# Altium PCB Irradiance Sensor2.PcbDoc
Units mil, origin at the board's own origin, x right, y up, seen from the top; angles counter-clockwise.
Board outline 4210 x 2650 mil, 2 copper layers (Top Layer, Bottom Layer); 70 components, 50 nets, 240 pads, 29 vias.
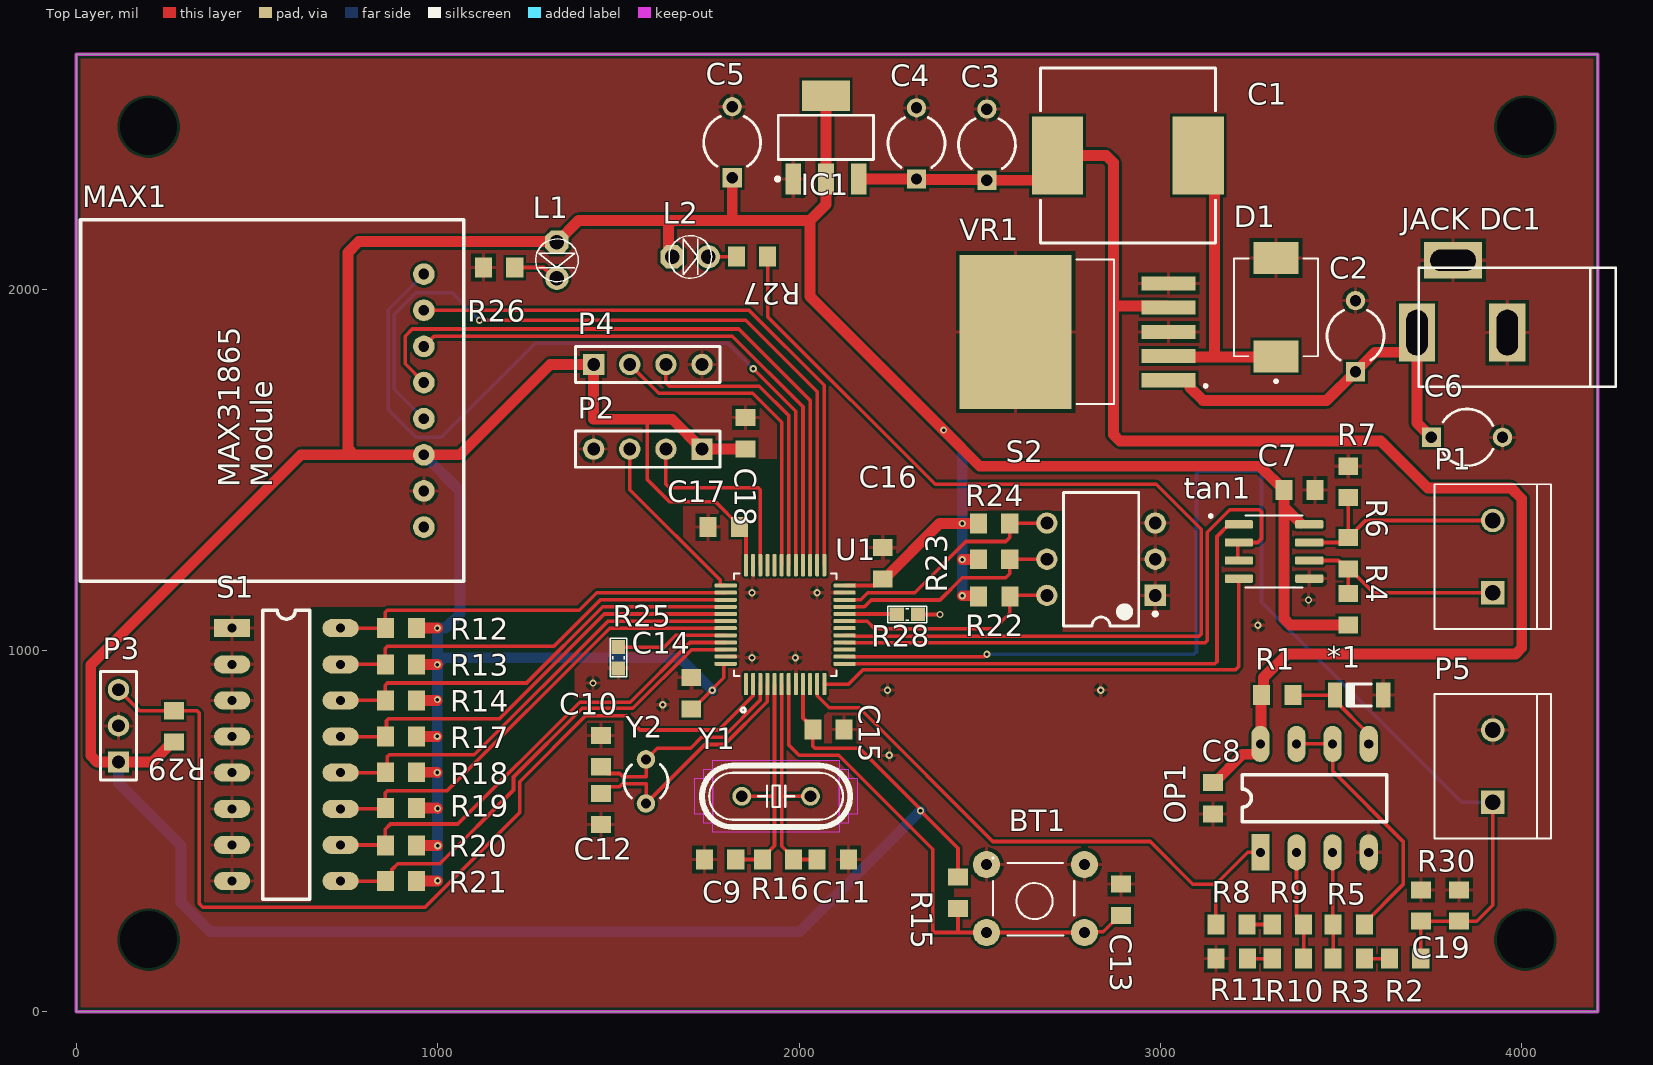
[diagram p0: Top Layer view]
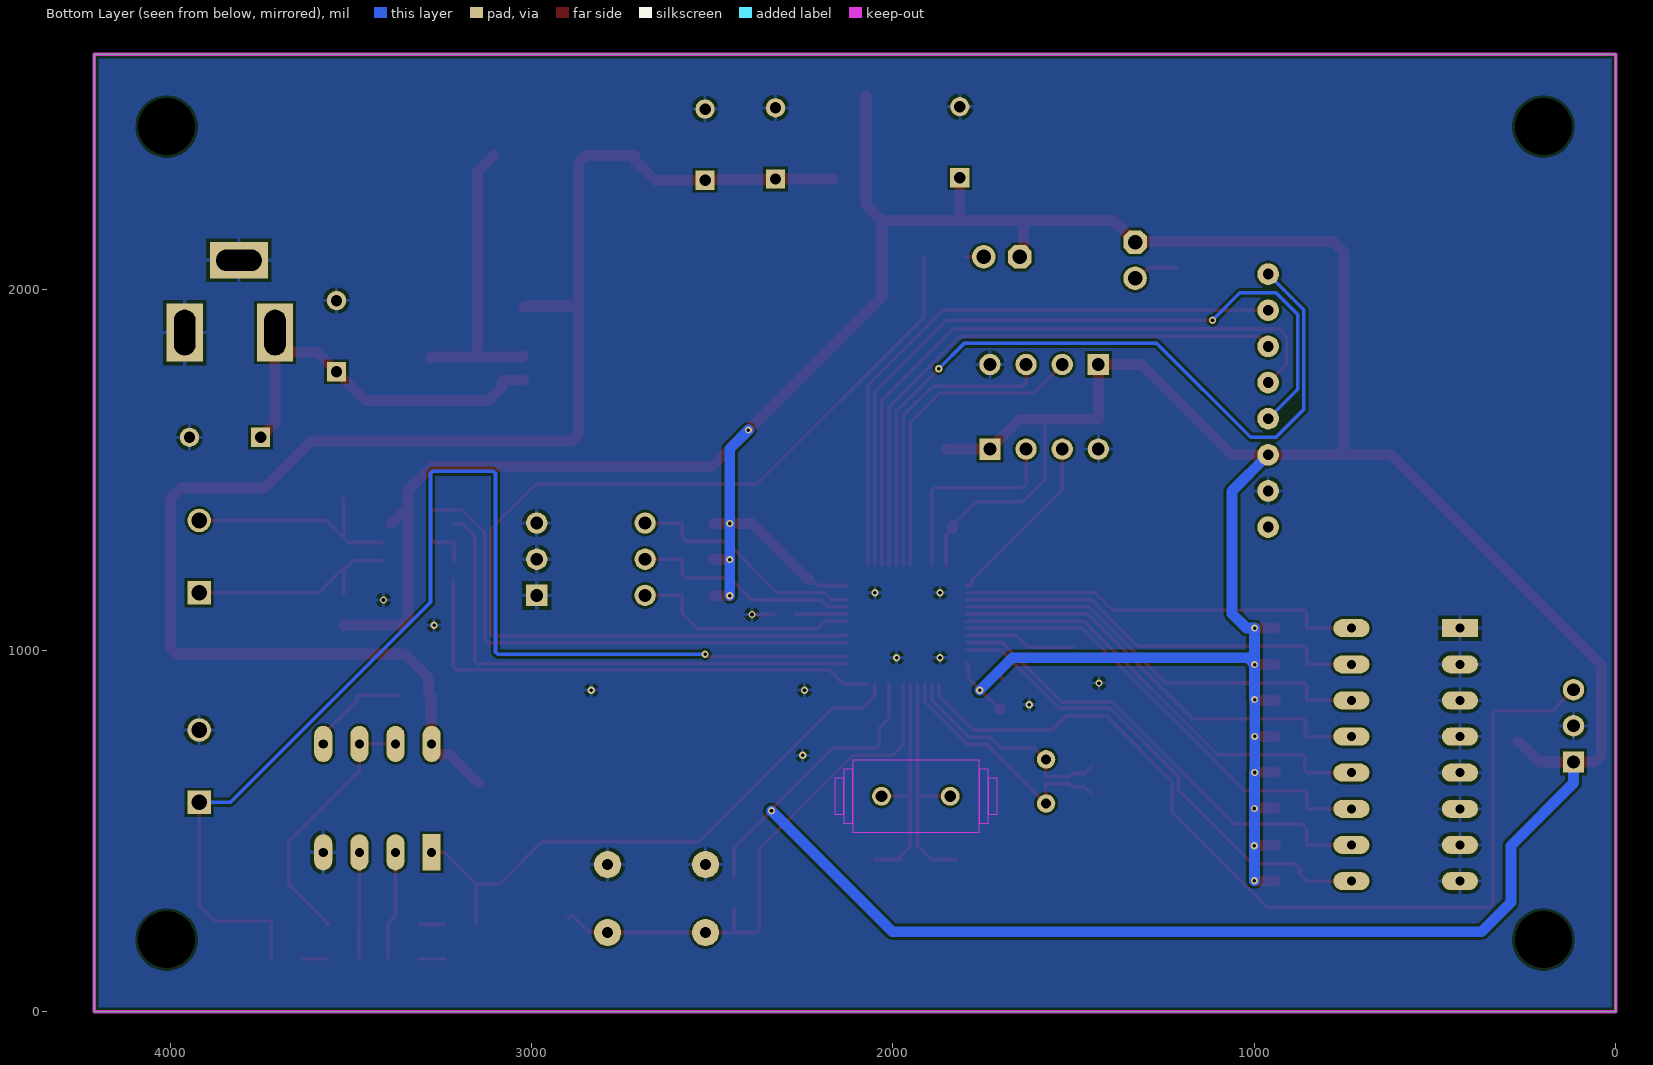
[diagram p1: Bottom Layer view, seen from below]

## Layer stack, top to bottom
Top Solder: solder mask 0.4, Solder Resist, Dk 3.5
Top Layer: signal copper 1.4
Dielectric 1: dielectric 12.6, FR-4, Dk 4.8
Bottom Layer: signal copper 1.4
Bottom Solder: solder mask 0.4, Solder Resist, Dk 3.5

## Board outline
0,0.12 0,2650.12 4210,2650.12 4210,117.83 4210,0.12

## Design rules (kind name [scope] priority, off if disabled: settings)
Clearance [All] p1: gap=7 ignorepadtopadclearanceinfootprint=FALSE
PolygonConnect [All] p1: connectstyle=Relief reliefconductorwidth=10 reliefentries=4 polygonreliefangle="90 Angle" airgapwidth=10
RoutingVias [All] p1: holewidth=10 width=20 viastyle="Through Hole" minholewidth=10 minwidth=20 maxholewidth=28 maxwidth=50
SolderMaskExpansion [IsVia] p1: expansion=4 istentingtop=TRUE
SolderMaskExpansion SolderMaskExpansion_1 [All] p2: expansion=4 istentingtop=FALSE
Width Width_1 [InNetClass('Power Supply')] p1: maxlimit=30 minlimit=10 preferedwidth=30
Width [All] p2: maxlimit=30 minlimit=10 preferedwidth=10
30 further rules are at their usual default settings.

## Classes and differential pairs
component class "Irradiance Sensor": *1 BT1 C1 C2 C3 C4 C5 C6 C7 C8 C9 C10 C11 C12 C13 C14 C15 C16 C17 C18 C19 IC1 "JACK DC1" L1 L2 MAX1 OP1 P1 P2 P3 P4 P5 R1 R2 R3 R4 R5 R6 R7 R8 R9 R10 R11 R12 R13 R14 R15 R16 R17 R18 R19 R20 R21 R22 R23 R24 R26 R29 R30 S1 S2 tan1 U1 VR1 Y1 Y2

## Components (designator, comment, footprint, x,y, rotation, side; value= is the part's Value field where it differs from the comment)
*1 "BZV55" SOD-80C 3549.99,876.8 r0 top
BT1 "Nut Nhan 4 Chan Cam 6x6" "Nut Nhan 4 Chan Cam 6x6" 2776.69,211.8 r180 top
C1 "L127H" INDP122122X80N 2910,2370.12 r180 top
C2 "Cap2" CAPR5-4X5 3540,1870.12 r90 top value=680uF
C3 "Cap2" CAPR5-4X5 2520,2400.12 r90 top value=1000uF
C4 "Cap2" CAPR5-4X5 2325,2403.54 r90 top value=10uF
C5 "Cap2" CAPR5-4X5 1815,2406.69 r90 top value=10uF
C6 "Cap2" CAPR5-4X5 3848.43,1590.12 r0 top value=100pF
C7 "Cap" RESC2012X11N 3385,1444.23 r0 top
C8 "Cap" RESC2012X11N 3145.15,591.11 r270 top
C9 "Cap" RESC2012X11N 1781.69,421.8 r0 top
C10 "Cap" RESC2012X11N 1451.69,721.8 r270 top
C11 "Cap" RESC2012X11N 2093.56,421.8 r180 top
C12 "Cap" RESC2012X11N 1451.69,561.63 r90 top
C13 "Cap" RESC2012X11N 2891.32,310.32 r90 top
C14 "Cap" RESC2012X11N 1701.69,881.8 r90 top
C15 "Cap" RESC2012X11N 2081.69,781.8 r0 top
C16 "Cap" RESC2012X11N 2231.69,1241.8 r90 top
C17 "Cap" RESC2012X11N 1791.69,1341.8 r180 top
C18 "Cap" RESC2012X11N 1852.3,1601.25 r90 top
C19 "Cap" RESC2012X11N 3721.22,294.45 r90 top
D1 "SS34" DIOM7959X265N 3320,1950.12 r90 top
IC1 "LM1117" SOT230P700X180-4N 2074.45,2420.28 r90 top
"JACK DC1" "JACK DC 5.5" "JACK DC 5.5" 3835,1980.12 r180 top value="Jac DC"
L1 "LED 3mm" LED-3MM-RED 1330,2130.12 r270 top
L2 "LED 3mm" LED-3MM-GREEN 1649.12,2089.67 r0 top
MAX1 "MAX31865" MAX31865 961.69,1341.8 r90 top
OP1 "MCP6002" DIP8 3276.69,441.8 r90 top
P1 "Header 2" TE_282837-2 3920,1260.12 r90 top
P2 "SWD" HDR1X4 1731.69,1557.5 r180 top
P3 "DS18B20 Input" HDR1X3 116.69,691.8 r90 top
P4 "Debug" HDR1X4 1431.69,1791.8 r0 top
P5 "Header 2" TE_282837-2 3920,680.12 r90 top
R1 "Res" RESC2012X11N 3323.38,876.8 r180 top value=1k
R2 "Res" RESC2012X11N 3677.21,147.52 r180 top value=1k
R3 "Res" RESC2012X11N 3521.51,147.52 r180 top value=1k
R4 "Res" RESC2012X11N 3520,1114.23 r270 top value=1k
R5 "Res" RESC2012X11N 3521.51,241.8 r180 top value=1k
R6 "Res" RESC2012X11N 3520,1269.23 r270 top value=1k
R7 "Res" RESC2012X11N 3520,1466.81 r270 top value=1k
R8 "Res" RESC2012X11N 3197.69,147.52 r0 top value=1k
R9 "Res" RESC2012X11N 3352.94,147.52 r0 top value=1k
R10 "Res" RESC2012X11N 3352.94,241.91 r180 top value=1k
R11 "Res" RESC2012X11N 3196.83,241.8 r180 top value=1k
R12 "Res" RESC2012X11N 898.38,1062.09 r180 top value=1k
R13 "Res" RESC2012X11N 898.38,961.83 r180 top value=1k
R14 "Res" RESC2012X11N 898.38,862.04 r180 top value=1k
R15 "Res" RESC2012X11N 2440,330.12 r90 top value=1k
R16 "Res" RESC2012X11N 1941.69,421.8 r180 top value=1k
R17 "Res" RESC2012X11N 898.38,761.8 r180 top value=1k
R18 "Res" RESC2012X11N 898.38,663.37 r180 top value=1k
R19 "Res" RESC2012X11N 898.38,564.39 r180 top value=1k
R20 "Res" RESC2012X11N 898.38,460.64 r180 top value=1k
R21 "Res" RESC2012X11N 898.38,362.37 r180 top value=1k
R22 "Res" RESC2012X11N 2540,1150.12 r0 top value=1k
R23 "" RESC2012X11N 2539.8,1252.87 r0 top value=1k
R24 "" RESC2012X11N 2539.8,1352.07 r0 top value=1k
R25 "10k" "tro smd 0603" 1500,980.12 r90 top
R26 "Res" RESC2012X11N 1170,2060.12 r0 top value=1k
R27 "Res" RESC2012X11N 1870,2090.12 r180 top value=1k
R28 "10k" "tro smd 0603" 2300,1100 r180 top
R29 "Res" RESC2012X11N 270,790.12 r270 top value=1k
R30 "Res" RESC2012X11N 3826.87,294.45 r270 top value=1k
S1 "SW DIP-8" DIP16 431.16,1062.09 r0 top
S2 "SW DIP-3" DIP-6 2835.84,1252.87 r180 top
tan1 "MAX3485EESA+" SOIC127P600X175-8N 3314.54,1274.23 r0 top
U1 "STM32F103C8T6" QFP50P900X900X160-48N 1961.69,1071.75 r90 top
VR1 "LM2596S-5.0" TO170P1524X483-6N 2770.82,1882.05 r180 top
Y1 "8Mhz" HC49US 1936.69,596.8 r0 top
Y2 "32,768k" R38 1576.36,637.82 r180 top

## Footprints (in the part's own frame and the unit in brackets; to place one, negate y for a bottom-side part, rotate by r counter-clockwise, add the part's x,y. Pads: shape width x height; smd on the part's side, far side on the other; paste and mask are expansions set on the pad)
CAPR5-4X5 [mm] "Capacitor; 2 Leads"
  rect 1.35x1.35 hole 0.8: 1(-2.5,0)
  round 1.35 hole 0.8: 2(2.5,0)
  silkscreen extent -1.69,-2 1.82,2
DIOM7959X265N [mm]
  rect 2.25x3.18 smd: A(3.455,0) C(-3.455,0)
  silkscreen extent -5.3,-2.95 3.44,2.95
DIP8 [mil]
  rect 100x50 hole 25: 1(0,0)
  oval 100x50 hole 25: 2(0,-100) 3(0,-200) 4(0,-300) 5(300,-300) 6(300,-200) 7(300,-100) 8(300,0)
  silkscreen extent 85,-350 215,50
DIP16 [mil]
  rect 100x50 hole 25: 1(0,0)
  oval 100x50 hole 25: 2(0,-100) 3(0,-200) 4(0,-300) 5(0,-400) 6(0,-500) 7(0,-600) 8(0,-700) 9(300,-700) 10(300,-600) 11(300,-500) 12(300,-400) 13(300,-300) 14(300,-200) 15(300,-100) 16(300,0)
  silkscreen extent 85,-750 215,50
DIP-6 [mm] "DIP; 6 Leads; Row Spacing 7.62 mm; Pitch 2.54 mm"
  rect 1.5x1.5 hole 0.9: 1(-3.81,2.54)
  round 1.5 hole 0.9: 2(-3.81,0) 3(-3.81,-2.54) 4(3.81,-2.54) 5(3.81,0) 6(3.81,2.54)
  silkscreen extent -3.94,-4.7 2.65,4.7, body extent -3.55,-4.7 3.55,4.7, height 5.46
HC49US [mil]
  round 52 hole 32: 1(-95,0) 2(95,0)
  Keep-Out Layer region: 175,-100 -175,-100 -175,100 175,100
  Keep-Out Layer region: -175,-75 -200,-75 -200,75 -175,75
  Keep-Out Layer region: -200,-50 -225,-50 -225,50 -200,50
  Keep-Out Layer region: 200,-75 175,-75 175,75 200,75
  Keep-Out Layer region: 225,-50 200,-50 200,50 225,50
  silkscreen extent -205,-85 205,85
HDR1X3 [mm] "Connector; Header; 3 Position"
  rect 1.5x1.5 hole 0.9: 1(0,0)
  round 1.5 hole 0.9: 2(2.54,0) 3(5.08,0)
  silkscreen extent -1.27,-1.27 6.35,1.27
HDR1X4 [mm] "Connector; Header; 4 Position"
  rect 1.5x1.5 hole 0.9: 1(0,0)
  round 1.5 hole 0.9: 2(2.54,0) 3(5.08,0) 4(7.62,0)
  silkscreen extent -1.27,-1.27 8.89,1.27
INDP122122X80N [mm] "Precision Wire Wound Inductor, 2-Leads, Body 12.15x12.15mm, IPC Medium Density"
  rect 3.6x5.5 smd: 1(-4.95,0) 2(4.95,0)
  silkscreen extent -6.15,-6.15 6.15,6.15, body extent -6.15,-6.15 6.15,6.15, height 8
"JACK DC 5.5" [mil] "Jac DC input"
  rect 100x160 hole 59.06 slot 125.98 at 90 deg: 1(125,100) 2(-125,100)
  rect 160x100 hole 59.06 slot 125.98 at 0 deg: 3(25,-100)
  silkscreen extent -425,-80 120,250, body extent -410,-105 134,269, height 434
LED-3MM-GREEN [mil]
  oct 65x65 hole 40: 1(0,0)
  round 65 hole 40: 2(100,0)
  silkscreen extent -9,-59 109,59, body extent -15,-70 112,60, height 182
LED-3MM-RED [mil]
  oct 65x65 hole 40: 1(0,0)
  round 65 hole 40: 2(100,0)
  silkscreen extent -9,-59 109,59, body extent -27,-77 117,80, height 181
MAX31865 [mil]
  round 60 hole 30: 1(0,0) 2(100,0) 3(200,0) 4(300,0) 5(400,0) 6(500,0) 7(600,0) 8(700,0)
  silkscreen extent -150,-110 850,950
"Nut Nhan 4 Chan Cam 6x6" [mil] "SW button 4pin, 250 x250 mil"
  round 75 hole 31: 1(-13,-8) 1(258,-8) 2(-13,-196) 2(258,-196)
  silkscreen extent 15,-215 240,0, body extent -31,-225 281,19, height 276
QFP50P900X900X160-48N [mm]
  rrect50% 1.56x0.28 smd: 1(-4.18,2.75) 2(-4.18,2.25) 3(-4.18,1.75) 4(-4.18,1.25) 5(-4.18,0.75) 6(-4.18,0.25) 7(-4.18,-0.25) 8(-4.18,-0.75) 9(-4.18,-1.25) 10(-4.18,-1.75) 11(-4.18,-2.25) 12(-4.18,-2.75) 25(4.18,-2.75) 26(4.18,-2.25) 27(4.18,-1.75) 28(4.18,-1.25) 29(4.18,-0.75) 30(4.18,-0.25) 31(4.18,0.25) 32(4.18,0.75) 33(4.18,1.25) 34(4.18,1.75) 35(4.18,2.25) 36(4.18,2.75)
  rrect50% 0.28x1.56 smd: 13(-2.75,-4.18) 14(-2.25,-4.18) 15(-1.75,-4.18) 16(-1.25,-4.18) 17(-0.75,-4.18) 18(-0.25,-4.18) 19(0.25,-4.18) 20(0.75,-4.18) 21(1.25,-4.18) 22(1.75,-4.18) 23(2.25,-4.18) 24(2.75,-4.18) 37(2.75,4.18) 38(2.25,4.18) 39(1.75,4.18) 40(1.25,4.18) 41(0.75,4.18) 42(0.25,4.18) 43(-0.25,4.18) 44(-0.75,4.18) 45(-1.25,4.18) 46(-1.75,4.18) 47(-2.25,4.18) 48(-2.75,4.18)
  silkscreen extent -6.15,-3.6 3.6,3.6
R38 [mm] "Crystal, Thru-Hole; 2 Leads; Body 3.1 x 8.2 mm (Dia.xH)"
  round 1.3 hole 0.7: 1(0,1.55) 2(0,-1.55)
  silkscreen extent -1.55,-1.19 1.55,1.17
RESC2012X11N [mm] "Chip Resistor, 2-Leads, Body 2.00x1.25mm, IPC Medium Density"
  rect 1.2x1.4 smd: 1(-1.1,0) 2(1.1,0)
  body extent -1.1,-0.72 1.1,0.73, height 1.1
SOD-80C [mm] "MELF Diode, 2-Leads, Body 3.50x1.53mm, IPC Medium Density"
  rect 1x1.75 smd: 1(-1.7,0) 2(1.7,0)
  silkscreen extent -0.85,-0.77 0.85,0.77, body extent -1.85,-0.8 1.85,0.8, height 1.6
SOIC127P600X175-8N [mm]
  rrect25% 1.97x0.59 smd: 1(-2.475,1.905) 2(-2.475,0.635) 3(-2.475,-0.635) 4(-2.475,-1.905) 5(2.475,-1.905) 6(2.475,-0.635) 7(2.475,0.635) 8(2.475,1.905)
  silkscreen extent -4.54,-2.52 2,2.59
SOT230P700X180-4N [mm] "SOT223, 4-Leads, Body 6.50x7.00mm (avg), Pitch 2.30mm, IPC Medium Density"
  rect 2.15x1.1 smd: 1(-2.925,2.3) 2(-2.925,0) 3(-2.925,-2.3)
  rect 2.15x3.35 smd: 4(2.925,0)
  silkscreen extent -3.05,-3.35 1.55,3.52, body extent -1.85,-3.35 1.85,3.35, height 1.8
TE_282837-2 [mm]
  rect 1.65x1.65 hole 1.1: 1(-2.54,0)
  round 1.65 hole 1.1: 2(2.54,0)
  silkscreen extent -5.08,-4.1 5.08,4.1, body extent -5.63,-4.26 5.13,3.94, height 9.79
TO170P1524X483-6N [mm]
  rect 3.79x0.99 smd: 1(-6.4,3.4) 2(-6.4,1.7) 3(-6.4,0) 4(-6.4,-1.7) 5(-6.4,-3.4)
  rect 7.88x10.84 smd paste-6: 6(4.35,0)
  silkscreen extent -9.1,-5.08 0.09,5.08
"tro smd 0603" [mm] "Chip Capacitor, 2-Leads, Body 1,60x0,80mm, IPC Medium Density"
  rect 1x0.95 smd mask+0.076: 1(-0.75,0) 2(0.75,0)
  silkscreen extent -1.35,-0.58 1.37,0.58, body extent -0.82,-0.42 0.82,0.43, height 0.44

## Part data
BT1: "Nut Nhan 4 Chan 6x6mm", Ma_Hang=MH004584, Ten="Nút Nhấn 4 Chân 6x6x5MM DIP"
C2 C3 C4 C5 C6: "Capacitor", PackageDescription="Capacitor; 2 Leads", PackageReference=CAPR5-4X5, Published=23-Sep-2002, Publisher="Altium Limited"
D1: "Diode Schottky 40V 3A Surface Mount SMC _DO-214AB_", Package="DO-214AB-214 ON Semiconductor", Availability=Unavailable, MF="ON Semiconductor", MP=SS34, Price=None, SnapEDA_Link=https://www.snapeda.com/parts/SS34/ON%20Semiconductor/view-part/4631325/?ref=snap
L1: library part "LED 3mm Do", "Cắm", Chung_Loai=Cắm, Don_Vi=Con, Ma_Hang=MH003892, Ten_Linh_Kien="Led 3MM Phủ Đỏ (10c)"
L2: library part "LED 3mm Xanh La", "Cắm", Chung_Loai=Cắm, Don_Vi=Con, Ma_Hang=MH001054, Ten_Linh_Kien="Led 3MM Phủ Xanh (10c)"
P1 P5: "Header, 2-Pin", LatestRevisionDate=17-Jul-2002, LatestRevisionNote="Re-released for DXP Platform.", Publisher="Altium Limited"
P2 P4: library part "Header 4", "Header, 4-Pin", LatestRevisionDate=17-Jul-2002, LatestRevisionNote="Re-released for DXP Platform.", Publisher="Altium Limited"
P3: library part "Header 3", "Header, 3-Pin", LatestRevisionDate=17-Jul-2002, LatestRevisionNote="Re-released for DXP Platform.", Publisher="Altium Limited"
R23 R24: library part Res
R25 R28: library part "Tro 0603 1% 10k", "Dán", Chung_Loai=Dán, Don_Vi=Con, Ma_Hang=MH006333, So_Chan=2, Ten_Linh_Kien="Trở 0603 1% 10k"
S1: "DIP Switch, 8 Position, SPST", LatestRevisionDate=17-Jul-2002, LatestRevisionNote="Re-released for DXP Platform.", PackageDescription="DIP Switch; 16 Leads", PackageReference=DIP_SW_8WAY_SMD, Published=24-Mar-1999, Publisher="Altium Limited"
S2: "DIP Switch, 3 Position, SPST", Code_JEDEC=MO-001-AM, LatestRevisionDate=17-Jul-2002, LatestRevisionNote="Re-released for DXP Platform.", PackageReference=DIP-6, Published=24-Mar-1999, Publisher="Altium Limited"
tan1: "1/1 Transceiver Half RS422, RS485 8-SOIC", Package="SOIC-8 Maxim", Availability=Unavailable, MF="Maxim Integrated", MP=MAX3485EESA+, Price=None, SnapEDA_Link=https://www.snapeda.com/parts/MAX3485EESA%2B/Maxim%20Integrated/view-part/558005/?ref=snap
U1: "ARMÂ® CortexÂ®-M3 STM32F1 Microcontroller IC 32-Bit 72MHz 64KB _64K x 8_ FLASH", Package="LQFP-48 STMicroelectronics", Availability=Unavailable, MF=STMicroelectronics, MP=STM32F103C8T6, Price=None, SnapEDA_Link=https://www.snapeda.com/parts/STM32F103C8T6/STMicroelectronics/view-part/52195/?ref=snap
VR1: "SIMPLE SWITCHER&reg; 4.5V to 40V, 3A Low Component Count Step-Down Regulator 5-DDPAK/TO-263", Package="TO-263-5 Texas Instruments", Availability=Good, DigiKey-Purchase-URL=https://snapeda.com/shop?store=DigiKey&id=15588, MF="Texas Instruments", Mouser-Purchase-URL=https://snapeda.com/shop?store=Mouser&id=15588, MP=LM2596S-5.0/NOPB, Price=None, SnapEDA_Link=https://www.snapeda.com/parts/LM2596S-5.0/NOPB/Texas%20Instruments/view-part/15588/?ref=snap, Texas_Instruments-Purchase-URL=https://snapeda.com/shop?store=Texas+Instruments&id=15588
Y1: library part DIP-CRYSTAL-8MHZ-20PF-20PPM-60R(HC49US), "DIP Crystal 8MHz-20pF-20ppm-60R;", Package=None, Availability=Unavailable, MF=Xinhunjing, MP=49S8M, Price=None, SnapEDA_Link=https://www.snapeda.com/parts/49S8M/Xinhunjing/view-part/105661/?ref=snap
Y2: library part XTAL, "Crystal Oscillator", LatestRevisionDate=17-Jul-2002, LatestRevisionNote="Re-released for DXP Platform.", PackageDescription="Crystal, Thru-Hole; 2 Leads; Body 3.1 x 8.2 mm (Dia.xH)", PackageReference=R38, Published=8-Jun-2000, Publisher="Altium Limited"
C7 C8 C14 C15 C16 C17 C18 C19: Cap=0.1uF
C9 C10 C11 C12: Cap=20pF
C13: Cap=0.01uF

## Free pads (board coordinates)
  round 60 hole 157.48: 2(200,200.12) 2(200,2450.12) 2(4010,200.12) 2(4010,2450.12)

## Via types
v1: diameter 20, hole 10, Top Layer to Bottom Layer, tented both sides, 29 vias

## Nets (pads, with @x,y where several pads share a name; then routed paths per layer and width w, separated by ;. In a path a pad name is that pad's centre, name@x,y a point inside that pad or via, vN(x,y) a via of type N, cw(c..) or ccw(c..) an arc to the next point about the centre after c; other vN are vias at no path point)
3.3V: C5.1 C7.1 C14.1 C15.1 C16.1 C17.1 C18.1 IC1.2 IC1.4 L1.1 L2.1 MAX1.3 P2.1 P3.1 P4.1 R4.2 R12.1 R13.1 R14.1 R15.2 R17.1 R18.1 R19.1 R20.1 R21.1 R22.1 R23.1 R24.1 R29.2 tan1.8 U1.9 U1.24 U1.36 U1.48 | length 15433.6
  Top Layer w10: 1431.69,1640.12 1431.69,1641.8 ; 1580,1640.12 1580,1473.48 1641.69,1411.8 1768.93,1411.8 C17.1@1834.99,1345.74 ; C14.1@1705.62,838.49 1791.69,924.56 1791.69,962.97 1792.2,963.48 U1.48 ; C17.1@1834.99,1337.86 1853.42,1319.44 U1.36 ; U1.9 2010.9,813.22 C15.1@2038.38,785.74 ; C15.1 2038.38,735.98 2044.24,730.12 2167.25,730.12 2334.2,563.17 2334.2,558.76 v1(2336.11,556.85) 2440,452.96 R15.2 ; U1.24 2209.28,1180.02 C16.1@2227.75,1198.49
  Top Layer w30: R29.2 266.07,746.81 211.06,691.8 57.58,691.8 40,709.37 40,960.12 621.69,1541.8 769.26,1541.8 ; R21.1 999.14,362.37 v1(999.72,362.96) ; R20.1 999.48,460.64 v1(1000,460.12) ; R19.1 998.53,564.39 v1(999.81,563.1) ; R18.1 997.99,663.37 v1(998.83,662.53) ; R17.1 v1@998.83,761.8 ; R14.1 998.59,862.04 v1@998.83,861.8 ; R13.1 998.63,961.83 v1(999.3,961.17) ; R12.1 999.23,1062.09 v1(999.3,1062.16) ; L2.1 1639.09,2099.71 1639.09,2179.2 1650,2190.12 ; C14.1 C14.1@1705.62,838.49 ; C5.1 1815,2195.12 1810,2190.12 ; C17.1@1834.99,1337.86 C17.1 C17.1@1834.99,1345.74 ; C18.1 1852.08,1557.72 1731.91,1557.72 P2.1 1649.07,1640.12 1580,1640.12 1431.69,1640.12 P4.1 1311.69,1791.8 1061.69,1541.8 MAX1.3 769.26,1541.8 ; IC1.4 IC1.2 2074.45,2234.57 2030,2190.12 ; C16.1 2235.62,1198.49 2388.93,1351.8 v1(2451.69,1351.8) 2496.22,1351.8 R24.1 ; v1(2451.69,1151.8) 2495.28,1151.8 R22.1@2496.49,1153.01 ; v1(2451.69,1251.8) 2495.42,1251.8 R23.1 ; 3345.77,1395.04 tan1.8@3388.2,1352.62 ; R4.2 3359.27,1070.92 3341.7,1088.5 C7.1 3275.81,1510.12 2500,1510.12 v1(2400,1610.12) 2030,1980.12 2030,2190.12 ; 769.26,1541.8 751.69,1559.37 751.69,2101.8 781.69,2131.8 1328.32,2131.8 L1.1 1390,2190.12 1650,2190.12 ; 1650,2190.12 1810,2190.12 ; 1810,2190.12 2030,2190.12
  Bottom Layer w30: P3.1 116.69,633.43 290,460.12 290,303.48 371.69,221.8 2001.69,221.8 v1@2336.42,556.54 ; MAX1.3 1061.69,1441.8 1061.69,1101.8 1022.05,1062.16 v1(999.3,1062.16) v1(999.3,961.17) ; v1@998.83,864.33 v1(998.83,762.44) v1(998.83,662.53) 999.81,661.54 v1(999.81,563.1) v1@999.81,459.93 ; v1(999.32,864.33) v1(999.3,961.17) ; v1(999.72,362.96) 999.72,459.83 v1(1000,460.12) ; v1(1760,890.12) 1670,980.12 1018.25,980.12 v1(999.3,961.17) ; v1(2400,1610.12) 2451.69,1558.43 v1(2451.69,1351.8) v1(2451.69,1251.8) v1(2451.69,1151.8)
5V: C1.2 C3.1 C4.1 C8.1 IC1.3 OP1.8 R1.2 VR1.4 | length 4423.2
  Top Layer w10: C8.1 C8.1@3163.78,653.04
  Top Layer w30: IC1.3 C4.1 2326.72,2303.41 2518.29,2303.41 C3.1 2659.26,2301.69 2715.12,2357.56 C1.2 2850,2370.12 2870,2350.12 2870,1953.46 ; VR1.4 3018.3,1953.46 2870,1953.46 ; C8.1 3149.09,634.42 3227.65,712.97 3267.45,712.97 3276.69,722.21 OP1.8 3278.38,743.49 3278.38,875.11 3285.79,882.52 3285.79,925.9 3350,990.12 3982.43,990.12 4000,1007.69 4000,1420.12 3970,1450.12 3740,1450.12 3610,1580.12 2887.58,1580.12 2870,1597.69 2870,1953.46
12+V: "JACK DC1.1" C2.1 C6.1 VR1.1 | length 1096.6
  Top Layer w30: VR1.1 3077.91,1748.19 3082.4,1743.7 3082.4,1727.69 3118.39,1691.69 3460,1691.69 C2.1 3594.01,1825.69 3675,1825.69 3710,1860.69 ; 3710,1880.12 3710,1860.69 ; C6.1 3710,1630.12 3710,1860.69
A: P1.1 R4.1 R6.2 tan1.6 | length 613.3
  Top Layer w10: tan1.6 3492.76,1249.23 3516.07,1225.92 R6.2 ; R4.1 R6.2 ; P1.1 3589.75,1160.12 3523.94,1225.92 R6.2
B: P1.2 R6.1 R7.2 tan1.7 | length 644.2
  Top Layer w10: tan1.7 3506.7,1299.23 R6.1 ; R7.2 R6.1 ; P1.2 3567.58,1360.12 R6.1
BOOT0: R25.2 U1.44 | length 310.6
  Top Layer w10: R25.2 1626.27,1009.65 1658.85,1042.22 U1.44
BOOT1: R28.2 U1.20 | length 145.5
  Top Layer w10: U1.20@2126.77,1101.79 U1.20 2269.19,1101.28 R28.2
GND: "JACK DC1.2" "JACK DC1.3" *1.2 BT1.2 C2.2 C3.2 C4.2 C5.2 C6.2 C7.2 C8.2 C9.1 C10.1 C11.1 C12.1 C13.2 C14.2 C15.2 C16.2 C17.2 C18.2 C19.2 D1.A IC1.1 MAX1.2 OP1.4 P2.4 P3.2 P4.4 P5.2 R7.1 R8.1 R25.1 R26.1 R28.1 R30.1 S1.1 S1.2 S1.3 S1.4 S1.5 S1.6 S1.7 S1.8 S2.1 S2.2 S2.3 tan1.5 U1.8 U1.23 U1.35 U1.47 VR1.3 VR1.5 VR1.6 | length 90.3
  Top Layer w10: C14.2@1697.75,925.11 C14.2 ; P4.4@1716.61,1772.19 1731.69,1787.27 P4.4 ; R28.1 v1(2390,1100)
  other v1: 2250,710.12 1622.76,850.12 2245,890.54 2835,890.54 1430,910.12 1870,980.12 1990,980.12 3270,1070.12 3410,1140.12 1870,1160.12 2050,1160.12
Irradiance: OP1.1 R11.2 U1.11 | length 1622.7
  Top Layer w10: U1.11 2050.78,906.67 2050.78,874.78 2083.76,841.8 2166.44,841.8 2536.44,471.8 2971.69,471.8 3089.85,353.63 3153.52,353.63 ; R11.2 3153.52,353.63 ; OP1.1 3241.69,441.8 3153.52,353.63
LED: R27.1 U1.17 | length 2889.9
  Top Layer w10: R27.1 1913.31,1923.42 2376.62,1460.12 2988.87,1460.12 3113,1335.98 3113,1045.91 3107.15,1040.05 2153.62,1040.05 2151.45,1042.22 U1.17
MISO2: MAX1.5 U1.27 | length 1816.9
  Top Layer w10: MAX1.5 910,1793.48 910,1870.12 930,1890.12 1833.37,1890.12 2030.58,1692.9 U1.27
MOSI2: MAX1.6 U1.28 | length 1580.6
  Top Layer w10: MAX1.6 990,1870.12 1815.37,1870.12 2010.9,1674.59 2010.9,1237.34 2010.39,1236.83 U1.28
Net*1_1: *1.1 OP1.5 R1.1 | length 290.2
  Top Layer w10: R1.1 *1.1 3483.06,862.04 3576.69,768.41 OP1.5
NetC1_1: C1.1 D1.C VR1.2 | length 835.5
  Top Layer w30: VR1.2 3025.29,1812.62 3150,1812.62 ; C1.1 3150,2325 3150,1812.62 ; D1.C@3280,1810.12 3277.5,1812.62 3150,1812.62
NetL1_2: L1.2 R26.2 | length 129.1
  Top Layer w10: R26.2 1292.83,2060.12 1322.83,2030.12 L1.2
NetL2_2: L2.2 R27.2 | length 50.7
  Top Layer w10: L2.2 1799.82,2089.67
NetOP1_2: OP1.2 R9.2 R10.1 | length 302.4
  Top Layer w10: OP1.2 3376.69,265.41 3396.25,245.85 R10.1 R9.2
NetOP1_3: OP1.3 R3.2 R5.2 | length 294.9
  Top Layer w10: OP1.3 3476.69,243.32 R5.2 R3.2
NetR2_2: R2.2 R3.1 | length 69.1
  Top Layer w10: R3.1 R2.2
NetR8_2: R8.2 R9.1 | length 68.6
  Top Layer w10: R8.2 R9.1
NetR10_2: R10.2 R11.1 | length 69.5
  Top Layer w10: R11.1 3240.24,241.91 R10.2
NSS2: MAX1.7 U1.25 | length 1691.7
  Top Layer w10: MAX1.7 1861.69,1941.8 2069.44,1734.04 2069.44,1236.83 U1.25
OSCIN: C9.2 R16.2 U1.5 Y1.1 | length 663
  Top Layer w10: C9.2 1894.44,421.8 1932.16,459.52 1932.16,601.8 ; Y1.1 1927.16,596.8 1932.16,601.8 ; U1.5 1932.16,601.8
OSCOUT: C11.2 R16.1 U1.6 Y1.2 | length 647.9
  Top Layer w10: U1.6 1951.84,458.89 1984.99,425.74 R16.1 C11.2 ; 1952.24,596.65 1952.39,596.8 Y1.2 ; R16.1@1976.86,421.8 R16.1@1976.86,425.74
PA15: R12.2 S1.16 U1.38 | length 1132.3
  Top Layer w10: S1.16 R12.2 855.07,1105.94 860.93,1111.8 1391.69,1111.8 1440.22,1160.33 U1.38
PB1: R22.2 S2.6 U1.19 | length 633.5
  Top Layer w10: U1.19 2188.41,1081.59 2210,1060 2539.89,1060 2583.31,1103.42 R22.2 ; R22.2@2583.11,1153.01 2583.25,1152.87 S2.6
PB3: R13.2 S1.15 U1.39 | length 1165.9
  Top Layer w10: S1.15 854.82,962.09 R13.2 855.07,1005.76 861.12,1011.8 1321.69,1011.8 1450.54,1140.65 U1.39
PB4: R14.2 S1.14 U1.40 | length 1198
  Top Layer w10: S1.14 855.02,862.09 R14.2 855.07,904.36 860.93,910.22 1246.06,910.22 1456.81,1120.96 U1.40
PB5: R17.2 S1.13 U1.41 | length 1230.6
  Top Layer w10: S1.13 854.79,762.09 R17.2 858.39,765.12 858.39,805.94 864.25,811.8 1171.69,811.8 1461.17,1101.28 U1.41
PB6: R18.2 S1.12 U1.42 | length 1261.6
  Top Layer w10: S1.12 853.79,662.09 R18.2 859.95,668.25 859.95,705.56 865.81,711.41 1101.3,711.41 1471.48,1081.59 U1.42
PB7: R19.2 S1.11 U1.43 | length 1297.4
  Top Layer w10: S1.11 852.77,562.09 R19.2 855.07,606.06 860.93,611.92 1025.85,611.92 1475.84,1061.91 U1.43
PB8: R20.2 S1.10 U1.45 | length 1325.8
  Top Layer w10: S1.10 853.63,462.09 R20.2 855.07,505.94 869.25,520.12 1055.96,520.12 1392.96,857.12 1532.96,857.12 1698.38,1022.54 U1.45
PB9: R21.2 S1.9 U1.46 | length 1360.2
  Top Layer w10: S1.9 854.78,362.09 873.69,381 873.69,394.26 889.55,410.12 1005.96,410.12 1210,614.16 1210,650.12 1400,840.12 1540,840.12 1702.74,1002.85 U1.46
PB10: R23.2 S2.5 U1.21 | length 637.3
  Top Layer w10: U1.21 2180.96,1120.96 2200,1140 2389.89,1140 2451.69,1201.8 2571.69,1201.8 2582.78,1212.89 R23.2@2582.78,1252.87 ; R23.2 S2.5
PB11: R24.2 S2.4 U1.22 | length 670.2
  Top Layer w10: U1.22 2170.65,1140.65 2190,1160 2319.89,1160 2461.69,1301.8 2571.69,1301.8 2583.11,1313.22 R24.2 2583.91,1352.87 S2.4
PC14: C10.2 U1.3 Y2.2 | length 612.7
  Top Layer w10: C10.2 1470.31,659.87 1503.62,659.87 1512.33,651.16 1576.69,651.16 Y2.2@1576.69,698.85 ; Y2.2 1607.63,730.12 1700,730.12 1730,760.12 1790,760.12 1892.28,862.39 1892.28,906.72 U1.3
PC15: C12.2 U1.4 Y2.1 | length 691.7
  Top Layer w10: C12.2 1470.31,623.56 1503.45,623.56 1511.69,631.8 1511.83,631.66 1575.78,631.66 1576.69,630.75 Y2.1@1576.69,577.13 ; Y2.1 Y2.1@1576.69,577.13 ; U1.4 1912.47,858.55 1794.05,740.12 1739.68,740.12 Y2.1@1576.69,577.13
READY: MAX1.8 U1.29 | length 2187.1
  Top Layer w10: v1(1873.37,1780.12) 1991.21,1662.27 U1.29
  Bottom Layer w10: MAX1.8 863,1943.12 863,1667.12 940,1590.12 1010,1590.12 1270,1850.12 1803.37,1850.12 v1(1873.37,1780.12)
RST: BT1.1 C13.1 R15.1 U1.7 | length 1531.1
  Top Layer w10: U1.7 1971.53,738.59 2000,710.12 2110,710.12 2370,450.12 2370,225.66 2375.86,219.8 2440,219.8 ; R15.1 2440,219.8 ; C13.1@2898.22,260.12 C13.1 2887.38,267.01 2842.19,221.82 2791.7,221.82 2789.69,219.8 2518.69,219.8 2440,219.8
RX1: P4.2 U1.31 | length 881.8
  Top Layer w10: P4.2 1611.69,1711.8 1871.69,1711.8 1951.84,1631.64 U1.31
RX2: tan1.1 U1.13 | length 1453.7
  Top Layer w10: U1.13 3150.78,963.48 3156.64,969.34 3156.64,1315.94 3189.93,1349.23 tan1.1
SCK2: MAX1.4 U1.26 | length 2110.9
  Top Layer w10: v1(1115.7,1914.42) 1852.57,1914.42 2050.27,1716.72 U1.26
  Bottom Layer w10: MAX1.4 880,1723.48 880,1930.12 940,1990.12 1040,1990.12 v1(1115.7,1914.42)
SWDCLK: P2.3 U1.37 | length 498.2
  Top Layer w10: P2.3@1531.69,1559.96 1531.69,1445.45 1782.47,1194.67 1782.47,1180.53 1782.98,1180.02 U1.37
SWDIO: P2.2 U1.34 | length 576
  Top Layer w10: P2.2@1631.69,1559.96 1631.69,1459.98 1640.8,1450.87 1886.93,1450.87 1892.79,1445.02 U1.34
Temp: P3.3 R29.1 U1.2 | length 2671.9
  Top Layer w10: P3.3 175.06,833.42 334.15,833.42 340,827.57 340,300.12 350,290.12 965.07,290.12 1227,552.06 1227,637.12 1410,820.12 1520,820.12 1560,780.12 1777.93,780.12 1872.59,874.78 1872.59,906.67 U1.2
TX1: P4.3 U1.30 | length 841.9
  Top Layer w10: P4.3 1631.69,1741.8 1641.69,1731.8 1890.25,1731.8 1971.53,1650.52 U1.30
TX2: tan1.4 U1.12 | length 1410.6
  Top Layer w10: U1.12 2137.07,907.18 2176.37,946.48 3207.6,946.48 3217.1,955.98 tan1.4
TxEnable: tan1.2 tan1.3 U1.16 | length 1678.8
  Top Layer w10: U1.16 2126.77,1022.03 3124.15,1022.03 3130,1027.88 3130,1327.8 3192.32,1390.12 3274.15,1390.12 3280,1384.26 3280,1310.12 3269.12,1299.23 3214.38,1299.23 tan1.3@3214.38,1249.23
Vin: C19.1 P5.1 R2.1 R30.2 U1.14 | length 3489.7
  Top Layer w10: U1.14 2513.05,983.17 v1(2520,990.12) ; R2.1 3720.52,250.45 C19.1 R30.2 3875.83,251.15 3920,295.32 P5.1
  Bottom Layer w10: v1(2520,990.12) 3094.15,990.12 3100,995.98 3100,1490.12 3105.86,1495.98 3274.15,1495.98 3280,1490.12 3280,1133.48 3833.37,580.12 P5.1
Vref: OP1.6 OP1.7 R5.1 | length 725
  Top Layer w10: OP1.7 OP1.6 3476.69,666.8 3671.69,471.8 3671.69,352.61 3564.82,245.74 R5.1
pads on no net: MAX1.1 U1.1 U1.10 U1.15 U1.18 U1.32 U1.33

## Polygon pours and split planes (outlines as drawn)
GND on Bottom Layer "GND_L02_P001" (solid, pour order 1): 0,2650.12 0,0.12 4210,0.12 4210,2650.12
GND on Top Layer "GND_L01_P000" (solid, remove dead copper, pour order 0): 0.05,2650.01 0,2649.96 0,0 4209.89,0 4210,0.12 4210,2650.12 0,2650.12

## Keep-outs
Keep-Out Layer:
  lines w10: 0,0.12 0,2650.12 4140,2650.12 4210,2650.12 4210,117.83 4210,0.12 0,0.12

## Other copper
Top Layer:
  pour cut-out: 2520,1386.68 2730,1386.68 2730,1050 2520,1050
  pour cut-out: 2380,1190 2380.32,1189.68 2572.25,1189.68 2572.25,1082.25 2570,1080 2569.88,1080.12 2371.92,1080.12
  pour cut-out: 2160,1080.12 2583.84,1080.12 2580,1050.12 2159.34,1050.12 2151.45,1042.22
  pour cut-out: 2465.87,1329.37 2398.22,1329.37 2260,1191.15 2260,1150.12 2292.7,1150.12 2460.1,1317.51 2465.87,1317.51
  pour cut-out: 1695.16,1520.97 1704.31,1530.12 1940,1530.12 1940,1278.78 1935.45,1274.22 1889.21,1274.22 1690.86,1472.57
  pour cut-out: 1592.24,1617.69 1639.78,1617.69 1695.16,1562.3 1695.16,1520.97 1690,1515.82 1690,1410.12 1592.24,1507.88
  pour cut-out: 1640,1440.2 1641.57,1438.64 1880.55,1438.64 1880.55,1280.28 1865.65,1280.28 1865.65,1376.32 1865.62,1376.36 1820.36,1376.36 1772.68,1424.04 1653.83,1424.04
  pour cut-out: 1540,1540.12 1550,1530.12 1640,1530.12 1640,1440.2 1638.83,1439.03 1680,1397.86 1680,1314.44 1543.92,1450.52
  pour cut-out: 852.28,1120.45 650.34,1120.45 650,1120.12 650,300.12 990,300.12
  pour cut-out: 1380,950.12 1380,860.12 972.31,452.42 972.31,598.95
  pour cut-out: 2382.24,446.8 2383.33,447.89 2427.77,447.89 2427.77,232.04 2382.24,232.04
  pour cut-out: 2126.08,717.88 2124.16,715.97 2124.16,711.95 2388.22,447.89 2427.77,447.89 2427.77,452.29 2162.18,717.88
  pour cut-out: 1514.94,807.88 1516.25,807.88 1556.25,767.88 1611.5,767.88 1517.25,673.63
  pour cut-out: 1514.94,807.88 1514.94,671.19 1611.63,767.88 1713.93,767.88 1713.93,765.18 1715.85,763.26 1694.94,742.35 1602.56,742.35 1563.78,703.57 1563.78,664.06 1564.45,663.39 1517.4,663.39
  pour cut-out: 2069,816.36 2025.06,816.36 2023.13,818.29 2023.13,865.12
  pour cut-out: 2023.13,865.12 2028.11,870.1 2039.48,870.1 2079.08,830.5 2069,820.42 2069,816.36
  pour cut-out: 2082.85,929.58 2082.96,929.47 2103.33,929.47 2103.33,950.72 2103.89,951.28 2157.74,951.28 2162.26,946.76 2133.4,917.9 2084.17,917.9 2082.41,919.66

## Text inside footprints (layer, text, board x,y; h text height)
MAX1: Top Overlay "MAX31865 / Module" at 541.69,1451.8 h60 r90